# EAGLE board pasivizator2 (EAGLE 7.3.0)
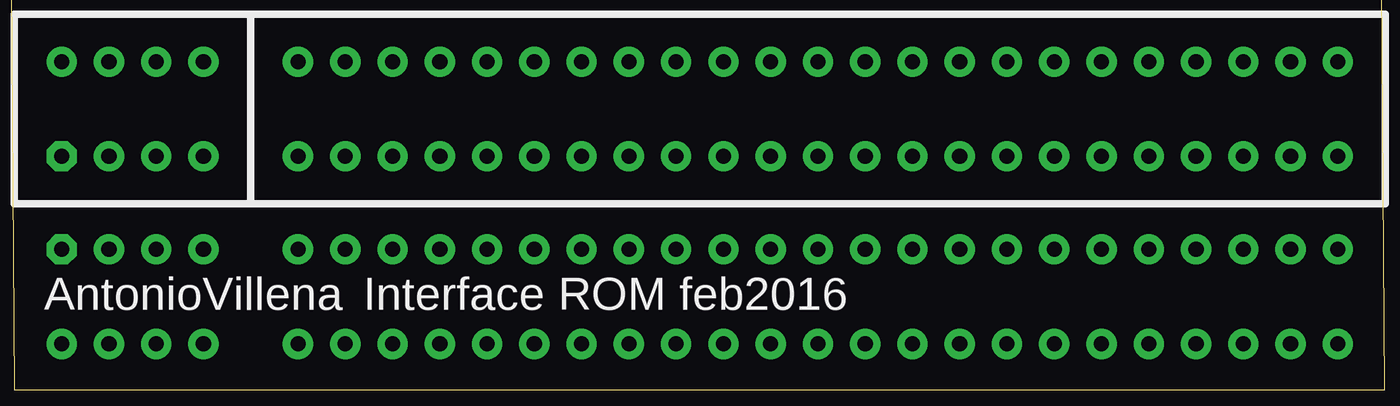
[diagram p0: board, top side]
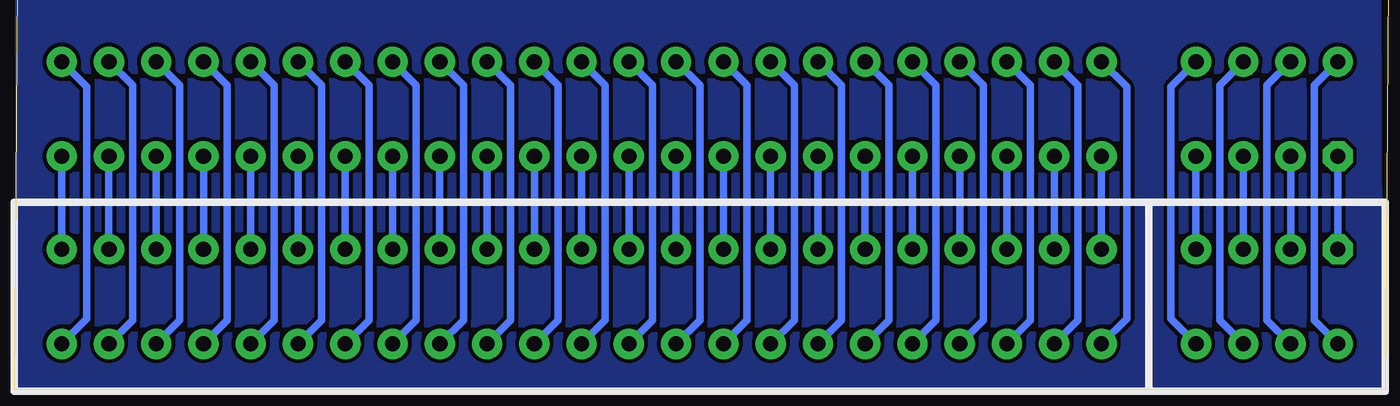
[diagram p1: board, bottom side, seen from below]

No outline drawn. Coordinates in mm, seen from the top.
Copper layers (1*16): Top 0.035mm / dielectric 1.5mm / Bottom 0.035mm
Design rules "default": minimum track width 10mil, minimum drill 24mil, track to track 8mil, track to pad 8mil, pad to pad 8mil, via to via 8mil, smd to smd 8mil, copper to edge 40mil, drill to drill 8mil, minimum pad ring 10mil, minimum via ring 8mil, stop-mask expansion 4mil, vias tented up to drill 0mil, thermal gap 10mil
Milling: 4 lines

## Footprints (pad centres in the part's own frame; a part is rotated, then mirrored left to right if it is on the bottom)
2X28_SPE = drill 0.813 pad 1.626 octagon: A1 0,-5.08 | drill 0.813 pad 1.626: A2 2.54,-5.08; A3 5.08,-5.08; A4 7.62,-5.08; A6 12.7,-5.08; A7 15.24,-5.08; A8 17.78,-5.08; A9 20.32,-5.08; A10 22.86,-5.08; A11 25.4,-5.08; A12 27.94,-5.08; A13 30.48,-5.08; A14 33.02,-5.08; A15 35.56,-5.08; A16 38.1,-5.08; A17 40.64,-5.08; A18 43.18,-5.08; A19 45.72,-5.08; A20 48.26,-5.08; A21 50.8,-5.08; A22 53.34,-5.08; A23 55.88,-5.08; A24 58.42,-5.08; A25 60.96,-5.08; A26 63.5,-5.08; A27 66.04,-5.08; A28 68.58,-5.08; B1 0,0; B2 2.54,0; B3 5.08,0; B4 7.62,0; B6 12.7,0; B7 15.24,0; B8 17.78,0; B9 20.32,0; B10 22.86,0; B11 25.4,0; B12 27.94,0; B13 30.48,0; B14 33.02,0; B15 35.56,0; B16 38.1,0; B17 40.64,0; B18 43.18,0; B19 45.72,0; B20 48.26,0; B21 50.8,0; B22 53.34,0; B23 55.88,0; B24 58.42,0; B25 60.96,0; B26 63.5,0; B27 66.04,0; B28 68.58,0

## Placement (x,y rotation side)
U$1  [2X28_SPE]  2.54,17.62 0 top
U$3  [2X28_SPE]  2.54,2.46 180 bottom

## Library data of the parts
U$1 U$3 = zx_edge

## Nets
N$1: U$1.B22 U$3.B22
N$2: U$1.B20 U$3.B20
N$3: U$1.B23 U$3.B23
N$4: U$1.A26 U$3.A26
N$5: U$1.A19 U$3.A19
N$6: U$1.B15 U$3.B15
N$7: U$1.B13 U$3.B13
N$8: U$1.B17 U$3.B17
N$9: U$1.A13 U$3.A13
N$10: U$1.B24 U$3.B24
N$11: U$1.B16 U$3.B16
N$12: U$1.B14 U$3.B14
N$13: U$1.B18 U$3.B18
N$14: U$1.A20 U$3.A20
N$15: U$1.B25 U$3.B25
N$16: U$1.A25 U$3.A25
N$17: U$1.B21 U$3.B21
N$18: U$1.B19 U$3.B19
N$19: U$1.A16 U$3.A16
N$20: U$1.A3 U$3.A3
N$21: U$1.A4 U$3.A4
N$22: U$1.A9 U$3.A9
N$23: U$1.A10 U$3.A10
N$24: U$1.A11 U$3.A11
N$25: U$1.A12 U$3.A12
N$26: U$1.A24 U$3.A24
N$27: U$1.A23 U$3.A23
N$28: U$1.A22 U$3.A22
N$29: U$1.A21 U$3.A21
N$30: U$1.B26 U$3.B26
N$31: U$1.A27 U$3.A27
N$32: U$1.B27 U$3.B27
N$33: U$1.A28 U$3.A28
N$34: U$1.A2 U$3.A2
N$35: U$1.B2 U$3.B2
N$36: U$1.A1 U$3.A1
N$37: U$1.B1 U$3.B1
N$38: U$1.A8 U$3.A8
N$39: U$1.B6 U$3.B6
N$40: U$1.B7 U$3.B7
N$41: U$1.B8 U$3.B8
N$42: U$1.B11 U$3.B11
N$43: U$1.B12 U$3.B12
N$44: U$1.B10 U$3.B10
N$45: U$1.B9 U$3.B9
N$46: U$1.B3 U$3.B3
N$47: U$1.A6 U$3.A6
N$48: U$1.A7 U$3.A7
N$49: U$1.A14 U$3.A14
N$50: U$1.B4 U$3.B4
N$51: U$1.B28 U$3.B28
N$52: U$1.A18 U$3.A18
N$53: U$1.A17 U$3.A17
N$54: U$1.A15 U$3.A15

## Tracks (layer width: path | path; a pad name or v marks a point on that pad's centre or on a via)
GND
  pour Bottom: 0.4,21.59 73.42,21.59 73.34,0.32 0.32,0.32
N$1
  Bottom 0.406: U$1.B22 54.61,16.35 54.61,3.73 U$3.B22
N$2
  Bottom 0.406: U$1.B20 49.53,16.35 49.53,3.73 U$3.B20
N$3
  Bottom 0.406: U$1.B23 57.15,16.35 57.15,3.73 U$3.B23
N$4
  Bottom 0.406: U$1.A26 U$3.A26
N$5
  Bottom 0.406: U$1.A19 U$3.A19
N$6
  Bottom 0.406: U$1.B15 36.83,16.35 36.83,3.73 U$3.B15
N$7
  Bottom 0.406: U$1.B13 31.75,16.35 31.75,3.73 U$3.B13
N$8
  Bottom 0.406: U$1.B17 41.91,16.35 41.91,3.73 U$3.B17
N$9
  Bottom 0.406: U$1.A13 U$3.A13
N$10
  Bottom 0.406: U$1.B24 59.69,16.35 59.69,3.73 U$3.B24
N$11
  Bottom 0.406: U$1.B16 39.37,16.35 39.37,3.73 U$3.B16
N$12
  Bottom 0.406: U$1.B14 34.29,16.35 34.29,3.73 U$3.B14
N$13
  Bottom 0.406: U$1.B18 44.45,16.35 44.45,3.73 U$3.B18
N$14
  Bottom 0.406: U$1.A20 U$3.A20
N$15
  Bottom 0.406: U$1.B25 62.23,16.35 62.23,3.73 U$3.B25
N$16
  Bottom 0.406: U$1.A25 U$3.A25
N$17
  Bottom 0.406: U$1.B21 52.07,16.35 52.07,3.73 U$3.B21
N$18
  Bottom 0.406: U$1.B19 46.99,16.35 46.99,3.73 U$3.B19
N$19
  Bottom 0.406: U$1.A16 U$3.A16
N$20
  Bottom 0.406: U$1.A3 U$3.A3
N$21
  Bottom 0.406: U$1.A4 U$3.A4
N$22
  Bottom 0.406: U$1.A9 U$3.A9
N$23
  Bottom 0.406: U$1.A10 U$3.A10
N$24
  Bottom 0.406: U$1.A11 U$3.A11
N$25
  Bottom 0.406: U$1.A12 U$3.A12
N$26
  Bottom 0.406: U$1.A24 U$3.A24
N$27
  Bottom 0.406: U$1.A23 U$3.A23
N$28
  Bottom 0.406: U$1.A22 U$3.A22
N$29
  Bottom 0.406: U$1.A21 U$3.A21
N$30
  Bottom 0.406: U$1.B26 64.77,16.35 64.77,3.73 U$3.B26
N$31
  Bottom 0.406: U$1.A27 U$3.A27
N$32
  Bottom 0.406: U$1.B27 67.31,16.35 67.31,3.73 U$3.B27
N$33
  Bottom 0.406: U$1.A28 U$3.A28
N$34
  Bottom 0.406: U$1.A2 U$3.A2
N$35
  Bottom 0.406: U$1.B2 6.35,16.35 6.35,3.73 U$3.B2
N$36
  Bottom 0.406: U$1.A1 U$3.A1
N$37
  Bottom 0.406: U$1.B1 3.81,16.35 3.81,3.73 U$3.B1
N$38
  Bottom 0.406: U$1.A8 U$3.A8
N$39
  Bottom 0.406: U$1.B6 13.89,16.27 13.89,3.81 U$3.B6
N$40
  Bottom 0.406: U$1.B7 16.51,16.35 16.51,3.73 U$3.B7
N$41
  Bottom 0.406: U$1.B8 19.05,16.35 19.05,3.73 U$3.B8
N$42
  Bottom 0.406: U$1.B11 26.67,16.35 26.67,3.73 U$3.B11
N$43
  Bottom 0.406: U$1.B12 29.21,16.35 29.21,3.73 U$3.B12
N$44
  Bottom 0.406: U$1.B10 24.13,16.35 24.13,3.73 U$3.B10
N$45
  Bottom 0.406: U$1.B9 21.59,16.35 21.59,3.73 U$3.B9
N$46
  Bottom 0.406: U$1.B3 8.89,16.35 8.89,3.73 U$3.B3
N$47
  Bottom 0.406: U$1.A6 U$3.A6
N$48
  Bottom 0.406: U$1.A7 U$3.A7
N$49
  Bottom 0.406: U$1.A14 U$3.A14
N$50
  Bottom 0.406: U$1.B4 11.51,16.27 11.51,3.81 U$3.B4
N$51
  Bottom 0.406: U$1.B28 69.77,16.27 69.77,3.81 U$3.B28
N$52
  Bottom 0.406: U$1.A18 U$3.A18
N$53
  Bottom 0.406: U$1.A17 U$3.A17
N$54
  Bottom 0.406: U$1.A15 U$3.A15

## Text on the board
tPlace: AntonioVillena | Interface ROM feb2016